# EAGLE board Display-Board_Rack-PDU_3.0 (EAGLE 9.2.1)
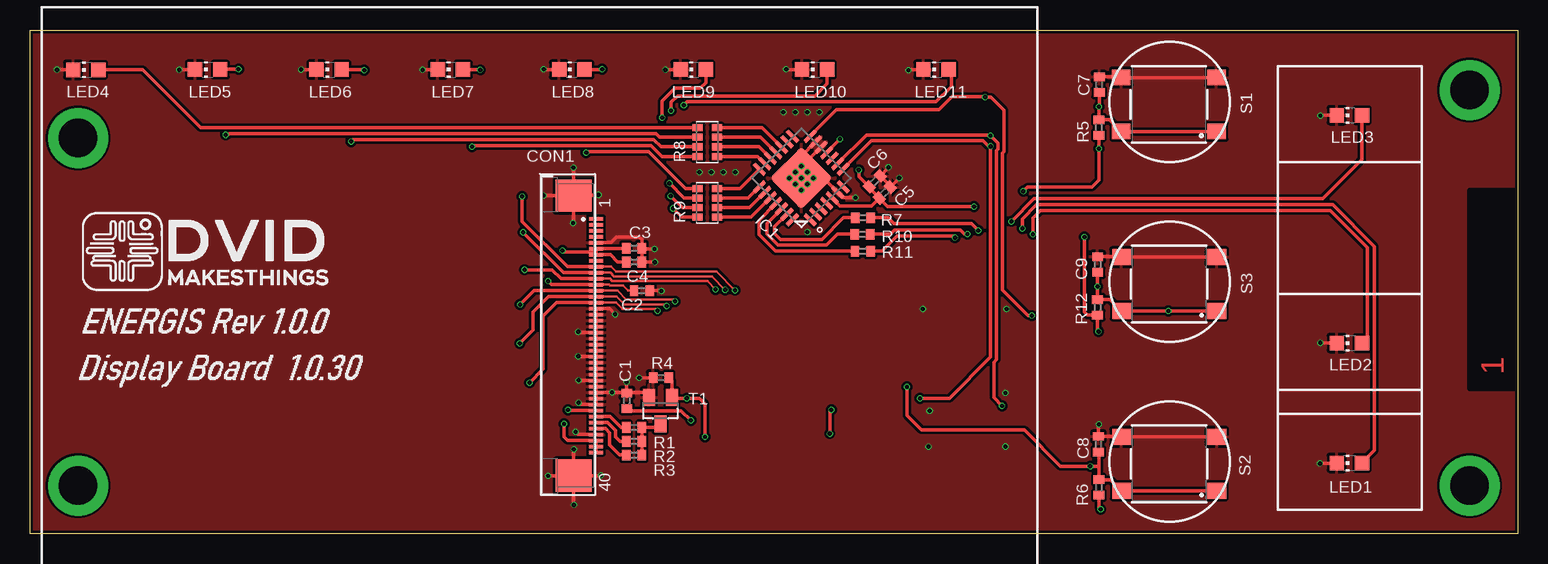
[diagram p0: board, top side]
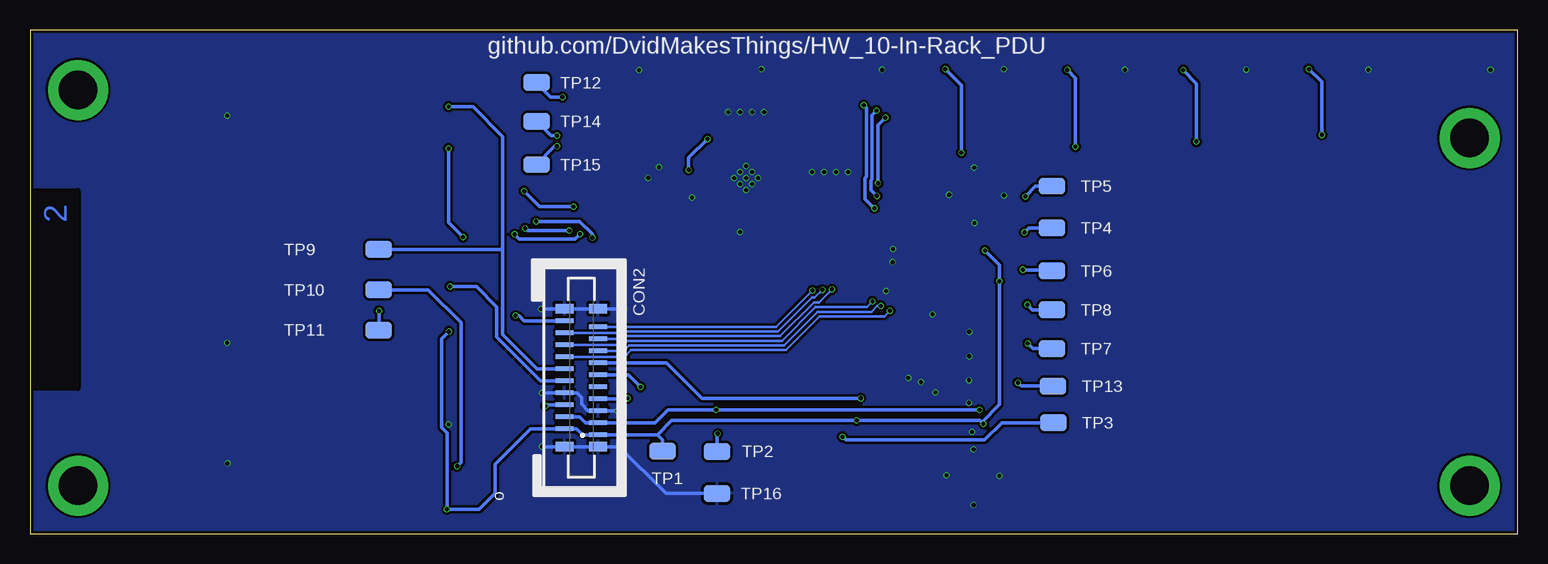
[diagram p1: board, bottom side, seen from below]

Size 124 x 42 mm. Coordinates in mm from the lower left corner, seen from the top.
Outline: 0,0 0,42 124,42 124,0 0,0
Copper layers (1*16): Top 0.035mm / dielectric 1.6mm / Bottom 0.035mm
Design rules "jlcpcb-2layers": minimum track width 5mil, minimum drill 0.3mm, track to track 5mil, track to pad 5mil, pad to pad 5mil, via to via 5mil, smd to smd 5mil, copper to edge 0.2mm, drill to drill 6mil, minimum pad ring 10mil, minimum via ring 3mil, stop-mask expansion 4mil, vias tented up to drill 0mil, thermal gap 10mil
Net classes: 0 default: width 0.2 mm, drill 0.35 mm, clearance 0.191 mm

## Footprints (pad centres in the part's own frame; a part is rotated, then mirrored left to right if it is on the bottom)
C0402 = smd 0.7 x 0.9: 1 -0.65,0; 2 0.65,0
FPC40_3.5TFT = smd 1.2 x 0.3: 1 24.191,10.261; 2 24.191,9.761; 3 24.191,9.261; 4 24.191,8.761; 5 24.191,8.261; 6 24.191,7.761; 7 24.191,7.261; 8 24.191,6.761; 9 24.191,6.261; 10 24.191,5.761; 11 24.191,5.261; 12 24.191,4.761; 13 24.191,4.261; 14 24.191,3.761; 15 24.191,3.261; 16 24.191,2.761; 17 24.191,2.261; 18 24.191,1.761; 19 24.191,1.261; 20 24.191,0.761; 21 24.191,0.261; 22 24.191,-0.239; 23 24.191,-0.739; 24 24.191,-1.239; 25 24.191,-1.739; 26 24.191,-2.239; 27 24.191,-2.739; 28 24.191,-3.239; 29 24.191,-3.739; 30 24.191,-4.239; 31 24.191,-4.739; 32 24.191,-5.239; 33 24.191,-5.739; 34 24.191,-6.239; 35 24.191,-6.739; 36 24.191,-7.239; 37 24.191,-7.739; 38 24.191,-8.239; 39 24.191,-8.739; 40 24.191,-9.239 | smd 3 x 2.7: Z1 22.331,12.191; Z2 22.331,-11.169
FPC20 = smd 0.4 x 1.5: 1 -4.552,-1.362; 2 -4.052,1.438; 3 -3.552,-1.362; 4 -3.052,1.438; 5 -2.552,-1.362; 6 -2.052,1.438; 7 -1.552,-1.362; 8 -1.052,1.438; 9 -0.552,-1.362; 10 -0.052,1.438; 11 0.448,-1.362; 12 0.948,1.438; 13 1.448,-1.362; 14 1.948,1.438; 15 2.448,-1.362; 16 2.948,1.438; 17 3.448,-1.362; 18 3.948,1.438; 19 4.448,-1.362; 20 4.948,1.438 | smd 0.8 x 1.5: Z1 -5.552,-1.362; Z2 -5.552,1.438; Z3 5.948,-1.362; Z4 5.948,1.438
QFN28[6X6]ML = smd 1.27 x 0.35: 1 -2.985,1.95; 2 -2.985,1.3; 3 -2.985,0.65; 4 -2.985,0; 5 -2.985,-0.65; 6 -2.985,-1.3; 7 -2.985,-1.95; 15 2.985,-1.95; 16 2.985,-1.3; 17 2.985,-0.65; 18 2.985,0; 19 2.985,0.65; 20 2.985,1.3; 21 2.985,1.95 | smd 0.35 x 1.27: 8 -1.95,-2.985; 9 -1.3,-2.985; 10 -0.65,-2.985; 11 0,-2.985; 12 0.65,-2.985; 13 1.3,-2.985; 14 1.95,-2.985; 22 1.95,2.985; 23 1.3,2.985; 24 0.65,2.985; 25 0,2.985; 26 -0.65,2.985; 27 -1.3,2.985; 28 -1.95,2.985 | smd 3.7 x 3.7: PAD 0,0
CHIP-LED0805 = smd 1.2 x 1.2: A 0,-1.05; C 0,1.05
0402 = smd 0.7 x 0.9: 1 -0.65,0; 2 0.65,0
742C083103JP = smd 0.59 x 0.92: 1 -1.2,-0.8; 2 -0.4,-0.8; 3 0.4,-0.8; 4 1.2,-0.8; 5 1.2,0.8; 6 0.4,0.8; 7 -0.4,0.8; 8 -1.2,0.8
430182043816 = smd 1.55 x 1.3: 1 -3.975,2.25; 2 -3.975,-2.25; 3 3.975,2.25; 4 3.975,-2.25
SOT23 = smd 1 x 1.4: 1 -0.95,-1.1; 2 0.95,-1.1; 3 0,1.1
TP = smd 2.2 x 1.4: TP 0,0

## Placement (x,y rotation side)
C1  10uF  [C0402]  49.75,11.07 90 top
C2  100nF  [C0402]  51,20.25 0 top
C3  10uF  [C0402]  50.35,23.8 0 top
C4  100nF  [C0402]  50.35,22.65 0 top
C5  100nF  [C0402]  71.26,28.44 45 top
C6  100nF  [C0402]  70.42,29.37 45 top
C7  100nF  [C0402]  89.14,37.44 90 top
C8  100nF  [C0402]  89.06,7.46 90 top
C9  100nF  [C0402]  89,22.44 90 top
CON1  FPC40-HD  [FPC40_3.5TFT]  23,16 0 top
CON2  FPC20-H  [FPC20]  78,12.8 90 bottom
IC1  MCP23017-E/ML  [QFN28[6X6]ML]  64.29,29.65 135 top
LED1  [CHIP-LED0805]  109.99,5.88 90 top
LED2  XL-2012UBC  [CHIP-LED0805]  109.99,15.88 90 top
LED3  XL-2012SURC  [CHIP-LED0805]  109.99,34.88 90 top
LED4  [CHIP-LED0805]  4.65,38.68 90 top
LED5  [CHIP-LED0805]  14.81,38.7 90 top
LED6  [CHIP-LED0805]  24.93,38.7 90 top
LED7  [CHIP-LED0805]  35.05,38.7 90 top
LED8  [CHIP-LED0805]  45.17,38.7 90 top
LED9  [CHIP-LED0805]  55.29,38.7 90 top
LED10  [CHIP-LED0805]  65.41,38.7 90 top
LED11  [CHIP-LED0805]  75.53,38.7 90 top
R1  56R  [0402]  50.35,8.85 180 top
R2  56R  [0402]  50.35,7.7 180 top
R3  56R  [0402]  50.35,6.55 180 top
R4  10K  [0402]  52.6,13 180 top
R5  10K  [0402]  89.1,33.86 90 top
R6  10K  [0402]  89.1,3.84 90 top
R7  1K  [0402]  69.44,26.34 0 top
R8  4D03WGJ0102T5E 1K  [742C083103JP]  56.46,32.65 90 top
R9  4D03WGJ0102T5E 1K  [742C083103JP]  56.46,27.59 90 top
R10  1K  [0402]  69.4,24.96 0 top
R11  1K  [0402]  69.42,23.55 0 top
R12  10K  [0402]  88.99,18.86 90 top
S1  TC-6601-5.0-160  [430182043816]  94.94,35.79 180 top
S2  TC-6601-5.0-160  [430182043816]  94.96,5.81 180 top
S3  TC-6601-5.0-160  [430182043816]  94.96,20.81 180 top
T1  BSS138  [SOT23]  52.55,10.25 180 top
TP1  TP  [TP]  71.26,6.88 180 bottom
TP2  TP  [TP]  66.74,6.85 0 bottom
TP3  TP  [TP]  38.7,9.25 0 bottom
TP4  TP  [TP]  38.8,25.5 0 bottom
TP5  TP  [TP]  38.8,28.98 0 bottom
TP6  TP  [TP]  38.8,21.9 0 bottom
TP7  TP  [TP]  38.8,15.43 0 bottom
TP8  TP  [TP]  38.8,18.66 0 bottom
TP9  TP  [TP]  94.92,23.7 0 bottom
TP10  TP  [TP]  94.92,20.33 0 bottom
TP11  TP  [TP]  94.92,16.96 0 bottom
TP12  TP  [TP]  81.79,37.61 0 bottom
TP13  TP  [TP]  38.71,12.3 0 bottom
TP14  TP  [TP]  81.79,34.39 0 bottom
TP15  TP  [TP]  81.79,30.77 0 bottom
TP16  TP  [TP]  66.74,3.35 0 bottom
U$1  [2-LAYER]  123.8,12.1 90 top

## Library data of the parts
C1-C9 R1-R7 R10-R12 TP1-TP16 U$1 = ds_passive
CON1 CON2 = ds_con
IC1 = ds_ic_peripherals
LED1-LED11 = led
R8 R9 = Resistor Array; CREATED_BY: PCBLayout.com; DIGIKEY_PN: 742C083103JPTR-ND; MANUFACTURER: CTS Resistor Products; MPN: 742C083103JP; PACKAGE: 1206
S1-S3 = Wurth_Switch_WS-TASV; DATASHEET-URL: https://www.we-online.com/redexpert/spec/430182043816?ae; HEIGHT: 4.3mm; OPERATION-FORCE: 160g; PART-NUMBER: 430182043816; QTY: 1000
T1 = transistor-fet

## Nets
+3V3: C1.1 C2.1 C3.1 C4.1 C5.1 C6.1 CON1.6 CON1.7 CON1.12 CON1.38 CON1.39 CON1.40 CON2.1 CON2.2 IC1.5 IC1.11 R5.1 R6.1 R12.1 TP1.TP
+5V: CON1.33 CON2.3 CON2.4 TP2.TP
GND: C1.2 C2.2 C3.2 C4.2 C5.2 C6.2 C7.2 C8.2 C9.2 CON1.5 CON1.16 CON1.17 CON1.18 CON1.19 CON1.20 CON1.21 CON1.22 CON1.23 CON1.24 CON1.25 CON1.26 CON1.27 CON1.28 CON1.29 CON1.30 CON1.31 CON1.32 CON1.37 CON1.Z1 CON1.Z2 CON2.5 CON2.8 CON2.Z1 CON2.Z2 CON2.Z3 CON2.Z4 IC1.6 IC1.12 IC1.13 IC1.PAD LED1.C LED2.C LED3.C LED4.C LED5.C LED6.C LED7.C LED8.C LED9.C LED10.C LED11.C R4.2 S1.2 S1.4 S2.2 S2.4 S3.2 S3.4 T1.2 TP16.TP
I2C0_SCL: CON2.7 IC1.8 TP15.TP
I2C0_SDA: CON2.6 IC1.9 TP14.TP
KEY_0: C7.1 CON2.12 R5.2 S1.1 S1.3 TP9.TP
KEY_1: C8.1 CON2.11 R6.2 S2.1 S2.3 TP10.TP
KEY_2: C9.1 CON2.10 R12.2 S3.1 S3.3 TP11.TP
KEY_3: CON2.9
LCD_BL: CON2.13 R4.1 T1.1 TP3.TP
LCD_CS: CON1.9 CON2.19 TP5.TP
LCD_DC: CON1.10 CON2.18 TP4.TP
LCD_MISO: CON1.14 CON2.15 TP7.TP
LCD_MOSI: CON1.13 CON2.16 TP8.TP
LCD_RES: CON1.15 CON2.14 TP13.TP
LCD_SCLK: CON1.11 CON2.17 TP6.TP
MCP_LCD_RST: CON2.20 IC1.14 TP12.TP
N$2: CON1.35 R2.2
N$3: CON1.36 R3.2
N$4: R1.1 R2.1 R3.1 T1.3
N$5: CON1.34 R1.2
N$46: IC1.26 R10.1
N$47: IC1.27 R7.1
N$48: IC1.25 R11.1
N$50: IC1.17 R8.4
N$51: IC1.18 R8.3
N$52: IC1.19 R8.2
N$53: IC1.20 R8.1
N$54: IC1.21 R9.4
N$55: IC1.22 R9.3
N$56: IC1.23 R9.2
N$57: IC1.24 R9.1
N$58: LED4.A R8.5
N$59: LED5.A R8.6
N$60: LED6.A R8.7
N$61: LED7.A R8.8
N$62: LED8.A R9.5
N$63: LED9.A R9.6
N$64: LED10.A R9.7
N$65: LED11.A R9.8
N$66: LED3.A R11.2
N$67: LED2.A R10.2
N$68: LED1.A R7.2

## Tracks (layer width: path | path; a pad name or v marks a point on that pad's centre or on a via)
+3V3  (via drill 0.35)
  Top 0.2: CON1.12 48.28,20.76 48.38,20.67 49.43,20.67 49.84,20.25 C2.1
  Top 0.305: v44.53,9.15 44.53,8.06 44.83,7.76 CON1.38 CON1.39 CON1.40 | C1.1 49.92,10.25 54.27,10.25 v55.09,9.43 | C3.1 49.66,23.76 CON1.6 47.19,23.5 | C4.1 48.99,22.65 48.38,23.26 CON1.7 47.19,23.5 | CON1.12 43.47,20.76 v43.18,21.05 | v44.38,23.61 44.49,23.5 47.19,23.5 | IC1.5 67.54,27.33 70.15,27.33 C5.1 | C5.1 69.96,28.81 C6.1 69.09,29.78 v69.09,30.33 | IC1.11 67.52,32.88 v67.52,32.91 | R6.1 89.1,2.18 v89.25,2.03 | v89.08,16.84 88.99,16.93 R12.1 88.16,18.21 87.91,18.46 v87.91,24.74 | R5.1 v89.11,32.1 89.11,29.47 88.53,28.89 83.14,28.89 v82.8,28.55 | C5.1 71.49,27.28 v78.7,27.28
  Bottom 0.305: 71.69,8.25 CON2.1 77.93,8.25 78.43,8.75 CON2.2 82.28,8.75 85.24,5.79 85.24,3.35 86.56,2.03 v89.25,2.03 89.25,8.41 89.69,8.85 89.69,16.23 v89.08,16.84 | 71.69,8.25 70.51,9.43 v55.09,9.43 44.81,9.43 44.66,9.28 | 44.66,9.28 v44.53,9.15 | v44.38,23.61 43.18,22.41 v43.18,21.05 43.18,10.76 44.66,9.28 | TP1.TP 71.26,7.82 71.69,8.25 | v67.52,32.91 69.09,31.34 v69.09,30.33 | v89.11,32.1 89.11,25.94 v87.91,24.74 | v78.7,27.28 81.53,27.28 v82.8,28.55
+5V  (via drill 0.35)
  Top 0.305: CON1.33 44.9,10.26 v44.84,10.32 | v66.67,8.33 66.67,10.19 v66.8,10.32
  Bottom 0.305: v44.84,10.32 v66.8,10.32 70.83,10.32 71.9,9.25 CON2.3 77.68,9.25 78.18,9.75 CON2.4 | TP2.TP 66.74,8.26 v66.67,8.33
GND  (via drill 0.35)
  Top 0.2: CON1.16 CON1.17 CON1.18 CON1.19 CON1.20 CON1.21 CON1.22 CON1.23 CON1.24 CON1.25 CON1.26 CON1.27 CON1.28 CON1.29 CON1.30 CON1.31 CON1.32 | v48.53,11.76 49.7,11.76 | 49.7,11.76 C1.2 49.75,11.88 49.75,12.61 | 49.7,11.76 51.19,11.76 | 51.47,11.48 T1.2
  Top 0.305: CON1.37 45.69,8.26 v45.47,8.48 | CON1.30 v48.53,11.76 | v48.53,11.76 49.63,11.76 49.75,11.88 | v48.53,11.76 51.19,11.76 51.47,11.48 | C1.2 49.75,12.61 v49.73,12.63 | R4.2 50.81,13 v50.79,12.98 | CON1.20 45.77,16.76 v45.7,16.83 | CON1.24 45.73,14.76 v45.7,14.79 | CON1.28 45.75,12.76 v45.72,12.79 | v45.73,10.91 45.88,10.76 CON1.32 CON1.16 48.3,18.76 v48.77,18.29 | CON1.Z2 43.19,4.83 v43.18,4.82 | CON1.Z2 47.58,4.83 v47.61,4.86 | CON1.Z2 v45.33,2.39 v45.34,2.38 | CON1.Z2 v45.33,7.01 v45.34,7.02 | CON1.Z1 45.33,30.5 v45.3,30.53 | CON1.Z1 45.39,28.25 v47.38,28.25 | CON1.Z1 v42.83,28.19 v42.82,28.2 | CON1.Z1 45.33,25.96 v45.26,25.89 | CON1.5 48.42,24.26 48.91,24.75 50.77,24.75 51,24.52 C3.2 | C3.2 C4.2 52.07,22.65 v52.09,22.63 | C3.2 51.06,23.74 v52.06,23.74 | C2.2 52.62,20.25 v52.63,20.24 | IC1.13 64.3,31.49 IC1.PAD | IC1.12 64.3,30.57 IC1.PAD | IC1.PAD 66.13,29.65 IC1.6 67.78,28.01 v68.81,28.01 | v71.56,30.55 71.56,30.51 C6.2 71.72,29 C5.2 72.46,29.64 v72.46,29.66 | LED4.C v2.25,38.67 | LED5.C 13.73,38.67 v12.44,38.67 | LED6.C v22.6,38.7 | LED7.C 32.76,38.7 v32.73,38.67 | LED8.C 42.87,38.7 v42.83,38.74 | LED9.C 54.21,38.67 v52.96,38.67 | LED10.C 63.06,38.7 v63.04,38.72 | LED11.C 73.29,38.7 v73.24,38.65 | C7.2 90.92,38.09 S1.4 S1.2 | C9.2 90.96,23.09 S3.4 S3.2 | S2.2 S2.4 90.94,8.11 C8.2 89.06,9.06 v89.1,9.1 | LED1.C 108.9,5.84 v107.54,5.84 | LED2.C 107.59,15.88 v107.56,15.91 | LED3.C 107.59,34.88 v107.56,34.85
  Bottom 0.305: TP16.TP 71,3.35 v74.9,7.25 CON2.Z1 CON2.Z2 v81.31,7.25 | v75,10.24 v75.01,10.25 CON2.5 77.47,10.25 78.02,10.8 78.02,11.36 78.41,11.75 CON2.8 v81.3,11.75 v81.31,11.74 | v74.42,18.74 v74.43,18.75 CON2.Z3 CON2.Z4 81.38,18.75 v81.41,18.72
  other vias: 64.29,29.65 63.79,29.15 64.29,28.65 64.79,29.15 65.29,29.65 64.79,30.15 64.29,30.65 63.79,30.15 63.29,29.65 62.79,35.15 63.79,35.15 64.79,35.15 65.79,35.15 55.79,30.15 56.79,30.15 57.79,30.15 58.79,30.15 64.79,25.15
  pour Bottom (isolate 0.203): -2.3,46.52 125.2,46.52 125.2,-13.28 -2.3,-13.28
  pour Top (isolate 0.203): -1.5,45.72 126.65,45.72 126.65,-12.68 -1.5,-12.68
I2C0_SCL  (via drill 0.35)
  Top 0.305: IC1.8 70.15,32.76 79.44,32.76 79.9,32.3 v80.08,32.3 80.08,14.73 76.63,11.28 v74.18,11.28
  Bottom 0.305: TP15.TP 80.26,32.3 v80.08,32.3 | CON2.7 74.21,11.25 v74.18,11.28
I2C0_SDA  (via drill 0.35)
  Top 0.305: IC1.9 69.73,33.25 79.99,33.25 v80.06,33.18 80.67,32.57 80.67,32.05 80.58,31.95 80.58,14.52 80.34,14.29 80.34,11.35 v81.04,10.65
  Bottom 0.305: v80.06,33.18 80.58,33.18 TP14.TP | CON2.6 80.94,10.75 v81.04,10.65
KEY_0  (via drill 0.35)
  Top 0.305: C7.1 89.14,35.63 v89.11,35.6 89.1,35.59 R5.2 89.99,34.51 S1.3 S1.1
  Bottom 0.305: CON2.12 81.75,13.75 84.59,16.59 84.59,23.63 | 84.59,23.63 84.59,33.12 87.07,35.6 v89.11,35.6 | TP9.TP 84.66,23.7 84.59,23.63
KEY_1  (via drill 0.35)
  Top 0.305: v73.1,12.23 73.1,9.86 74.33,8.63 82.9,8.63 85.91,5.62 v88.38,5.62 89.1,5.62 | C8.1 89.1,6.77 89.1,5.62 | 89.1,5.62 R6.2 90.05,4.49 S2.3 S2.1
  Bottom 0.305: CON2.11 74.12,13.25 v73.1,12.23 | TP10.TP 90.8,20.33 88.06,17.59 88.06,5.94 v88.38,5.62
KEY_2  (via drill 0.35)
  Top 0.305: C9.1 v89,20.6 R12.2 90.03,19.51 S3.3 v94.9,18.56 S3.1
  Bottom 0.305: CON2.10 81.45,12.75 85.08,16.39 85.08,18.91 86.77,20.6 v89,20.6 | TP11.TP 94.9,16.98 v94.9,18.56
LCD_BL  (via drill 0.35)
  Top 0.305: R4.1 53.5,12.75 T1.1 53.56,11.29 v54.75,11.29 55.8,11.29 56.26,10.83 v56.26,8.07
  Bottom 0.305: CON2.13 70.94,14.25 67.98,11.29 v54.75,11.29 | TP3.TP 42.99,9.25 44.43,7.81 56,7.81 v56.26,8.07
LCD_CS  (via drill 0.35)
  Top 0.2: v58.76,20.29 57.21,21.84 48.86,21.84 48.44,22.26 CON1.9
  Top 0.305: CON1.9 44.81,22.26 41.03,26.04 v41.03,28.12
  Bottom 0.2: CON2.19 61.8,17.25 v58.76,20.29
  Bottom 0.305: v41.03,28.12 40.17,28.98 TP5.TP
LCD_DC  (via drill 0.35)
  Top 0.2: CON1.10 48.39,21.76 48.7,21.45 56.83,21.45 v57.96,20.33
  Top 0.305: v41.1,25.12 44.47,21.76 CON1.10
  Bottom 0.2: v57.96,20.33 58.61,19.67 58.83,19.67 61.64,16.86 74.72,16.86 74.83,16.75 CON2.18
  Bottom 0.305: TP4.TP 40.73,25.5 v41.1,25.12
LCD_MISO  (via drill 0.35)
  Top 0.2: CON1.14 48.91,19.76 49.55,19.12 52.93,19.12 v53.08,18.97
  Top 0.305: v40.83,15.86 41.95,16.98 41.95,18.47 43.24,19.76 CON1.14
  Bottom 0.2: CON2.15 74.5,15.25 74.06,15.69 61.16,15.69 58.34,18.5 53.87,18.5 53.39,18.97 v53.08,18.97
  Bottom 0.305: TP7.TP 40.4,15.43 v40.83,15.86
LCD_MOSI  (via drill 0.35)
  Top 0.2: CON1.13 48.96,20.26 49.71,19.51 53.62,19.51 v53.76,19.37
  Top 0.305: v40.85,19.09 42.02,20.26 CON1.13
  Bottom 0.2: v53.76,19.37 54.24,18.89 58.5,18.89 61.32,16.08 74.22,16.08 74.55,15.75 CON2.16
  Bottom 0.305: TP8.TP 40.42,18.66 v40.85,19.09
LCD_RES  (via drill 0.35)
  Top 0.2: v52.31,18.58 52.16,18.73 49.38,18.73 48.85,19.26 CON1.15
  Top 0.305: CON1.15 43.88,19.26 42.78,18.16 42.78,13.71 v41.65,12.58
  Bottom 0.2: CON2.14 74.44,14.75 73.9,15.3 60.99,15.3 58.18,18.11 52.78,18.11 v52.31,18.58
  Bottom 0.305: v41.65,12.58 41.37,12.3 TP13.TP
LCD_SCLK  (via drill 0.35)
  Top 0.2: v57.15,20.37 56.46,21.06 48.54,21.06 48.34,21.26 CON1.11
  Top 0.305: CON1.11 44.27,21.26 43.53,22 v41.22,22
  Bottom 0.2: CON2.17 74.78,16.25 74.56,16.47 61.48,16.47 58.67,19.28 58.24,19.28 v57.15,20.37
  Bottom 0.305: v41.22,22 38.9,22 TP6.TP
MCP_LCD_RST  (via drill 0.35)
  Top 0.305: IC1.14 67.24,35.36 75.77,35.36 76.85,36.44 79.59,36.44 v79.62,36.41 80.09,36.41 81.17,35.33 81.17,31.85 81.07,31.75 81.07,20.3 83.2,18.17 v83.52,18.17
  Bottom 0.305: v79.62,36.41 80.59,36.41 TP12.TP | v83.52,18.17 83.23,18.17 82.81,17.75 CON2.20
N$1  (via drill 3.2 pad 5)
  other vias: 4,4
N$2
  Top 0.305: R2.2 49.19,7.7 48.81,8.07 48.81,8.61 48.16,9.26 CON1.35
N$3
  Top 0.305: CON1.36 47.96,8.76 48.31,8.41 48.31,7.4 49.16,6.55 R3.2
N$4
  Top 0.305: R3.1 R2.1 R1.1 52.25,8.85 T1.3
N$5
  Top 0.305: CON1.34 48.36,9.76 49.27,8.85 R1.2
N$6  (via drill 3.2 pad 5)
  other vias: 4,33
N$7  (via drill 3.2 pad 5)
  other vias: 120,37
N$8  (via drill 3.2 pad 5)
  other vias: 120,4
N$46
  Top 0.305: IC1.26 61.42,25.87 61.42,24.97 62.34,24.05 66.42,24.05 67.33,24.96 R10.1
N$47
  Top 0.305: R7.1 67.81,26.34 66.01,24.54 62.55,24.54 62.08,25.02 62.08,25.6 IC1.27
N$48
  Top 0.305: IC1.25 60.76,26.12 60.76,24.93 62.14,23.55 R11.1
N$50
  Top 0.305: R8.4 61.02,33.85 IC1.17
N$51
  Top 0.305: IC1.18 60.9,33.05 R8.3
N$52
  Top 0.305: R8.2 60.78,32.25 IC1.19
N$53
  Top 0.305: R8.1 60.66,31.45 IC1.20
N$54
  Top 0.305: R9.4 59.21,28.79 IC1.21
N$55
  Top 0.305: R9.3 59.87,27.99 IC1.22
N$56
  Top 0.305: R9.2 59.99,27.19 IC1.23
N$57
  Top 0.305: R9.1 60.11,26.39 IC1.24
N$58
  Top 0.305: R8.5 14.24,33.85 9.41,38.68 LED4.A
N$59  (via drill 0.35)
  Top 0.305: LED5.A 15.9,38.74 v17.38,38.74 | R8.6 52.49,33.05 52.19,33.36 16.59,33.36 16.48,33.25 v16.32,33.25
  Bottom 0.305: v17.38,38.74 16.32,37.68 v16.32,33.25
N$60  (via drill 0.35)
  Top 0.305: R8.7 52.59,32.25 51.98,32.86 26.92,32.86 v26.76,32.7 | v27.87,38.64 27.81,38.7 LED6.A
  Bottom 0.305: v26.76,32.7 26.76,37.53 v27.87,38.64
N$61  (via drill 0.35)
  Top 0.305: LED7.A 37.51,38.7 v37.54,38.67 | v36.86,32.27 36.96,32.37 51.78,32.37 52.69,31.45 R8.8
  Bottom 0.305: v37.54,38.67 36.86,37.99 v36.86,32.27
N$62  (via drill 0.35)
  Top 0.305: LED8.A 47.67,38.7 v47.7,38.73 | v46.37,31.77 46.47,31.87 51.58,31.87 54.66,28.79 R9.5
  Bottom 0.305: v47.7,38.73 46.37,37.4 v46.37,31.77
N$63  (via drill 0.35)
  Top 0.305: R9.6 54.52,27.99 v53.3,29.21 | v52.7,34.68 52.7,36.05 53.79,37.14 55.86,37.14 56.34,37.62 LED9.A
  Bottom 0.305: v53.3,29.21 53.3,34.08 v52.7,34.68
N$64  (via drill 0.35)
  Top 0.305: R9.7 54.38,27.19 v53.41,28.16 | v53.43,35.28 53.43,35.97 53.96,36.5 65.42,36.5 66.46,37.54 LED10.A
  Bottom 0.305: v53.41,28.16 53.89,28.64 53.89,29.46 53.8,29.55 53.8,34.91 v53.43,35.28
N$65  (via drill 0.35)
  Top 0.305: R9.8 54.34,26.39 v53.6,27.12 | v54.5,35.73 54.77,36.01 75.52,36.01 76.8,37.29 76.8,38.47 LED11.A
  Bottom 0.305: v53.6,27.12 54.39,27.91 54.39,29.66 54.29,29.76 54.29,35.52 v54.5,35.73
N$66  (via drill 0.35)
  Top 0.305: v77.12,24.67 76.99,24.8 72.27,24.8 71.02,23.55 R11.2 | v81.82,26.04 83.7,27.92 107.77,27.92 111.04,31.19 LED3.A
  Bottom 0.305: v77.12,24.67 77.12,24.98 78.18,26.04 v81.82,26.04
N$67  (via drill 0.35)
  Top 0.305: R10.2 71.71,24.96 72.07,25.32 77.56,25.32 77.89,24.98 v78.16,24.98 | v83.61,24.96 83.61,26.33 84.21,26.93 108.39,26.93 111.46,23.86 111.46,16.31 LED2.A
  Bottom 0.305: v78.16,24.98 78.57,24.57 83.22,24.57 v83.61,24.96
N$68  (via drill 0.35)
  Top 0.305: R7.2 71.54,26.34 72.03,25.85 78.47,25.85 v79.05,25.27 | v82.72,25.45 82.72,26.24 83.91,27.42 107.48,27.42 107.65,27.42 108.6,27.42 112.08,23.94 112.08,6.92 LED1.A
  Bottom 0.305: v79.05,25.27 82.54,25.27 v82.72,25.45

## Text on the board
bPlace: github.com/DvidMakesThings/HW_10-In-Rack_PDU
bNames: o